# EAGLE board Module-WiFi-M0-v0.4-Board 2 (EAGLE 7.5.0)
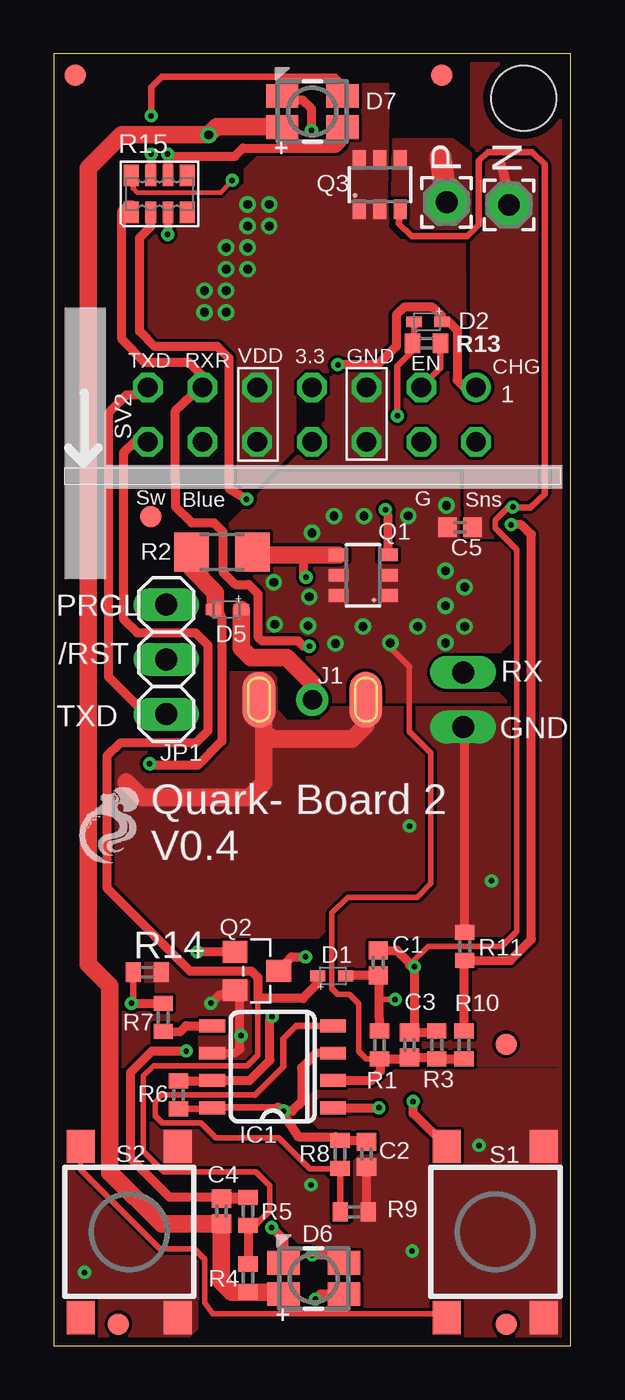
[diagram p0: board, top side]
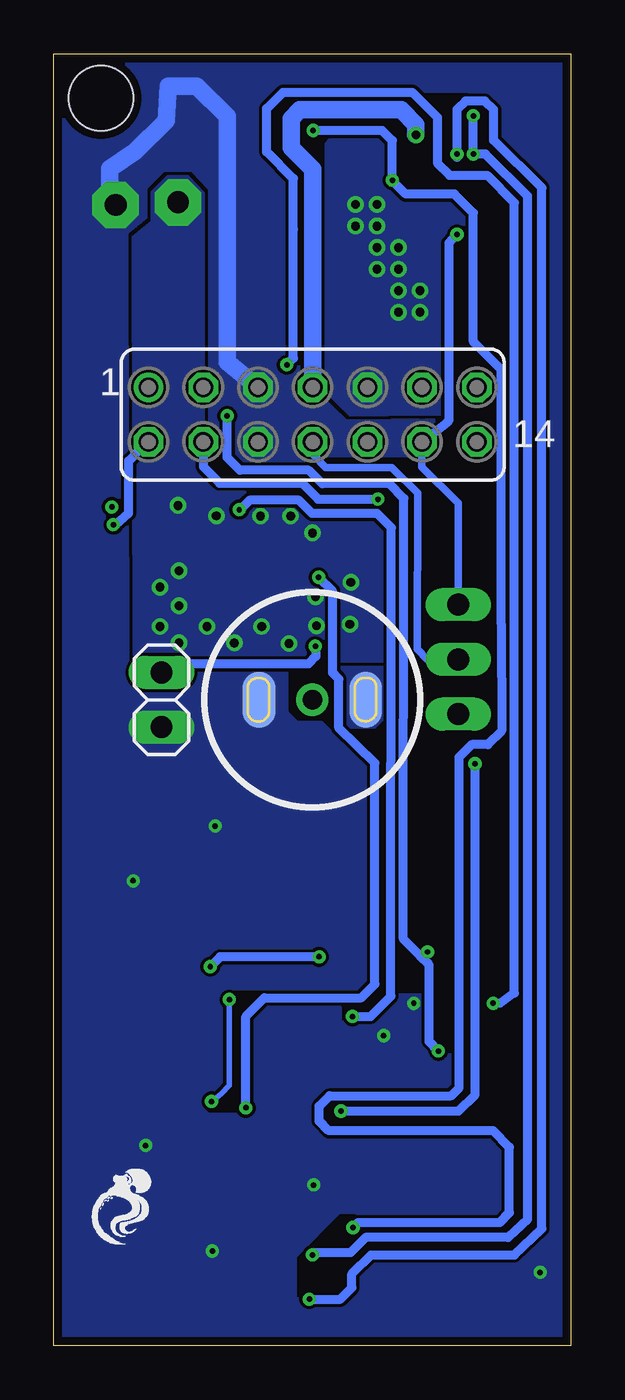
[diagram p1: board, bottom side, seen from below]

Size 24 x 60 mm. Coordinates in mm from the lower left corner, seen from the top.
Outline: 0,60 0,0 24,0 24,60 0,60
Copper layers (1*16): Top 0.0356mm / dielectric 1.5011mm / Bottom 0.0356mm
Design rules "oshpark-2layer-via-buried": minimum track width 6mil, minimum drill 10mil, track to track 6mil, track to pad 6mil, pad to pad 6mil, via to via 6mil, smd to smd 6mil, copper to edge 15mil, drill to drill 6mil, minimum pad ring 7mil, minimum via ring 7mil, stop-mask expansion 2.5mil, vias tented up to drill 16mil, thermal gap 10mil
Holes 3 mm at 21.81,57.94
tRestrict: 51 lines
bRestrict: area 7,16.4 to 8.1,16.6; 20 lines

## Footprints (pad centres in the part's own frame; a part is rotated, then mirrored left to right if it is on the bottom)
0402-CAP = smd 0.85 x 0.9: 1 -0.58,0; 2 0.58,0
SOD523 = smd 0.7 x 0.5: A 0.7,0; C -0.6,0
LED_RGB_DIFFUSE = smd 1.1 x 1.5: 1-RD -0.725,-1.4; 2-GR -0.725,1.4; 3-BL 0.725,1.4; 4-CA 0.725,-1.4
SOIC-8-TIGHT = smd 0.6 x 1.2: 1 -1.905,-2.8; 2 -0.635,-2.8; 3 0.635,-2.8; 4 1.905,-2.8; 5 1.905,2.8; 6 0.635,2.8; 7 -0.635,2.8; 8 -1.905,2.8
CONN-MAG = smd 1.5 x 2.6 bottom: GND@1 -2.475,0; GND@4 2.475,0 | smd 1.5 x 2.6: GND@2 2.475,0; GND@3 -2.475,0 | drill 0.9 pad 1.5: POS 0,0
1X03 = drill 1.016 long: 1 -2.54,0; 2 0,0; 3 2.54,0
2,15/1,0 = drill 1.016 pad 2.159 octagon: 1 0,0
SOT23-6 = smd 0.6 x 0.9: 1 -0.95,-1.15; 2 0,-1.15; 3 0.95,-1.15; 4 0.95,1.15; 5 0,1.15; 6 -0.95,1.15
SOT-23 = smd 1.016 x 1.143: 1 -0.889,-1.016; 2 0.889,-1.016; 3 0,1.016
R0402 = smd 0.7 x 0.9: 1 -0.65,0; 2 0.65,0
R1206 = smd 1.6 x 1.803: 1 -1.422,0; 2 1.422,0
RA1206-8 = smd 0.7 x 1: 1 -1.3,-0.85; 4 1.3,-0.85; 5 1.3,0.85; 8 -1.3,0.85 | smd 0.5 x 1: 2 -0.4,-0.85; 3 0.4,-0.85; 6 0.4,0.85; 7 -0.4,0.85
1X02 = drill 1.016 long: 1 -1.27,0; 2 1.27,0
TACTILE_SWITCH_TALL = smd 1.55 x 1.3: A1 -3.975,-2.25; A2 3.975,-2.25; B1 -3.975,2.25; B2 3.975,2.25
FE07-2 = drill 0.914: 1 -7.62,1.27 | drill 0.914 octagon: 2 -7.62,-1.27; 3 -5.08,1.27; 4 -5.08,-1.27; 5 -2.54,1.27; 6 -2.54,-1.27; 7 0,1.27; 8 0,-1.27; 9 2.54,1.27; 10 2.54,-1.27; 11 5.08,1.27; 12 5.08,-1.27; 13 7.62,1.27; 14 7.62,-1.27
FIDUCIAL = smd 1 x 1: P$1 0,0

## Placement (x,y rotation side)
C1  0.1uF  [0402-CAP]  15.06,17.78 90 top
C2  0.1uF  [0402-CAP]  14.51,8.89 270 top
C3  0.1uF  [0402-CAP]  16.51,13.97 90 top
C4  0.1uF  [0402-CAP]  7.78,6.25 90 top
C5  0.1uF  [0402-CAP]  18.85,38.01 0 top
D1  PMEG3005EB  [SOD523]  12.95,17.17 180 top
D2  PMEG3005EB  [SOD523]  17.32,47.55 0 top
D5  PMEG3005EB  [SOD523]  8.01,34.19 0 top
D6  [LED_RGB_DIFFUSE]  12.06,3.12 270 top
D7  [LED_RGB_DIFFUSE]  12,57.32 270 top
IC1  BQ2057WSNTR  [SOIC-8-TIGHT]  10.16,12.95 90 top
J1  CONN-CIR_MAG  [CONN-MAG]  12,30 0 bottom
JP1  [1X03]  5.22,31.87 270 top
N  WIREPAD2,15/1,0  [2,15/1,0]  21.13,52.98 270 top
P  WIREPAD2,15/1,0  [2,15/1,0]  18.23,53.1 270 top
Q1  IRLTS2242-PMOS  [SOT23-6]  14.36,35.78 90 top
Q2  2N7002-NMOS  [SOT-23]  9.42,17.4 270 top
Q3  IRLTS2242-PMOS  [SOT23-6]  15.14,53.92 0 top
R1  30k  [R0402]  15.11,13.97 270 top
R2  0.62E, 0.5W  [R1206]  7.81,36.86 0 top
R3  300k  [R0402]  17.78,13.97 270 top
R4  300k  [R0402]  9.02,3.14 270 top
R5  300k  [R0402]  9.02,6.25 270 top
R6  3k  [R0402]  5.79,11.65 270 top
R7  3k  [R0402]  5.08,15.24 90 top
R8  3k  [R0402]  13.29,8.89 270 top
R9  3k  [R0402]  13.95,6.22 0 top
R10  30k  [R0402]  19.05,13.97 270 top
R11  3k  [R0402]  19.08,18.54 270 top
R13  3k  [R0402]  17.3,46.56 0 top
R14  1k  [R0402]  4.34,17.35 0 top
R15  75E  [RA1206-8]  4.9,53.49 0 top
RX  [1X02]  19,30 270 bottom
S1  On/Off Sw  [TACTILE_SWITCH_TALL]  20.5,5.28 90 top
S2  On/Off Sw  [TACTILE_SWITCH_TALL]  3.5,5.28 90 top
SV2  [FE07-2]  11.98,43.24 0 bottom
U$1  [OCTO_LOGO]  22.63,4.52 0 bottom
U$2  [OCTO_LOGO]  0.79,22.23 0 top
U$3  FIDUCIAL  [FIDUCIAL]  3,1 0 top
U$4  FIDUCIAL  [FIDUCIAL]  1,59 0 top
U$5  FIDUCIAL  [FIDUCIAL]  18,59 0 top
U$6  FIDUCIAL  [FIDUCIAL]  21,1 0 top
U$7  FIDUCIAL  [FIDUCIAL]  4.5,38.5 0 top
U$8  FIDUCIAL  [FIDUCIAL]  21,14 0 top

## Library data of the parts
C1-C5 = 1_ZeroUI; PROD_ID: CAP-12416
D1 D2 D5 = diode
D6 D7 = 1_ZeroUI; VARIANT: ASMB-MTB1-0A3A2-Diffuse
IC1 = 1_ZeroUI; DATASHEETURL: http://www.ti.com/lit/ds/symlink/bq2057c.pdf
J1 Q1 Q3 U$1-U$8 = 1_ZeroUI
JP1 RX = pinhead
N P = wirepad
Q2 = 1_ZeroUI; MPN: 2N7002,215
R1-R11 R13 R14 = rcl
R15 = Seeed-OPL-Resistor
S1 S2 = 1_ZeroUI; PROD_ID: SWCH-11966
SV2 = con-lsta; OC_FARNELL: unknown; OC_NEWARK: unknown

## Nets
3.3V: C4.1 D6.4-CA D7.4-CA R4.2 SV2.7
12V: C2.1 D5.C IC1.3 IC1.8 R2.1 R6.2 R8.1
/RST: JP1.2 SV2.8
CHG_ON: D2.A R7.2 R14.1 SV2.1
GND: C2.2 C5.2 IC1.6 J1.GND@1 J1.GND@2 J1.GND@3 J1.GND@4 N.1 Q2.2 R9.2 R11.1 R14.2 RX.2 S1.A1 S1.A2 S2.A1 S2.A2 SV2.5 SV2.6
LED-G: R15.2 SV2.4
N$1: D6.1-RD D7.1-RD R15.8
N$2: D6.2-GR D7.2-GR R15.7
N$3: D6.3-BL D7.3-BL R15.6
N$4: C1.1 D1.C R1.1 S1.B1 S1.B2 S2.B1 S2.B2
N$5: C1.2 C3.2 Q2.3 Q3.3 R3.1
N$6: IC1.5 R7.1
N$7: D5.A J1.POS
N$8: R13.2 SV2.3
N$10: IC1.1 Q1.4 R2.2
N$13: IC1.7 Q1.3 R6.1
PROGL/LED-B: JP1.1 R15.3 SV2.12
PWR_EN: C4.2 D2.C Q2.1 R5.1 R13.1
RXD/LED-R: R15.1 RX.1 SV2.11
SW_INT: D1.A R4.1 R5.2 SV2.14
TS1: IC1.4 R8.2 R9.1
TXD: JP1.3 SV2.13
V_BATT: C3.1 C5.1 IC1.2 P.1 Q1.1 Q1.2 Q1.5 Q1.6 Q3.4 R1.2 R3.2 R10.2
VBATT_SENSE: R10.1 R11.2 SV2.2
VDD: Q3.1 Q3.2 Q3.5 Q3.6 SV2.9 SV2.10

## Tracks (layer width: path | path; a pad name or v marks a point on that pad's centre or on a via)
3.3V  (via drill 0.41)
  Top 0.813: 7.16,56.24 3.15,56.24 1.6,54.69 1.6,17.7 2.6,16.7 2.6,8.04 2.67,7.98 5.01,5.67 C4.1 7.78,2.96 8.25,2.49 R4.2 10.46,2.49 D6.4-CA | v7.19,56.24 7.16,56.24 | 7.16,56.24 7.55,56.62 10.53,56.62 D7.4-CA
  Bottom 0.813: SV2.7 11.99,45.33 11.99,54.63 12.98,55.64 12.98,56.99 12.58,57.4 7.88,57.4 7.19,56.71 v7.19,56.24
12V  (via drill 0.25)
  Top 0.305: 10.41,11.07 7.34,11.08 IC1.8 | R6.2 7.29,11.01
  Top 0.406: IC1.3 12.19,13.59 11.51,12.91 11.51,11.33 11.07,10.9 11,10.9 v10.67,10.89 10.67,10.73 10.76,10.6 | 10.41,11.07 10.59,10.9 10.7,10.9 10.7,10.7 10.76,10.6 | 10.76,10.6 11.34,9.7 13.08,9.7 R8.1 14.44,9.54 C2.1 | 7.5,34.19 D5.C 7.64,34.19 7.8,33.81 7.8,28.08 6.67,26.95 4.39,26.95 v4.45,27.03 | 6.4,36.65 R2.1 | 7.29,11.01 IC1.8
  Top 0.813: 7.5,34.19 7.5,34.98 6.4,36.09 6.43,36.62 6.4,36.65
  Bottom 0.406: v10.67,10.89 5.21,10.89 4.45,11.66 v4.45,27.03
/RST
  Bottom 0.305: SV2.8
  Bottom 0.356: JP1.2 6.65,31.88 7.14,32.36 7.11,39.59 8.31,40.79 11.38,40.79 11.96,41.38 SV2.8
CHG_ON  (via drill 0.25)
  Top 0.305: R14.1 3.69,15.99 v3.61,15.9
  Top 0.406: v3.61,15.9 3.85,15.89 R7.2 | SV2.1 19.05,44.51 18.72,44.85 18.72,47.16 18.35,47.54 D2.A 18,47.85 17.59,48.23 16.26,48.23 15.9,47.88 15.9,46.42 15.05,45.56 v13.18,45.56
  Bottom 0.406: v3.61,15.9 3.28,15.9 2.62,16.38 2.62,53.08 3.89,54.36 5.62,54.36 6.2,54.93 6.2,57.05 7.37,58.22 13.36,58.22 14.12,57.45 14.12,55.45 12.88,54.2 12.88,51.84 12.88,45.86 v13.18,45.56
GND  (via drill 0.25)
  Top 0.406: R9.2 14.55,6.12 14.55,6.1 14.5,6.22 C2.2 14.64,8.18 | IC1.6 8.39,13.59 8.64,13.78 8.64,16.05 Q2.2 7.7,16.28 7.42,16 v7.29,15.9 | R11.1 19.08,28.65 RX.2 | 9.75,29.77 J1.GND@4 | 21.23,53.24 20.78,54.84 N.1
  Top 0.813: 3.35,26.19 4.09,25.45 9.07,25.45 9.75,26.14 9.75,28.55 | 9.75,29.77 9.75,28.55 | 9.75,28.55 10.13,28.17 13.84,28.17 14.48,28.8 J1.GND@3
  Bottom 0.406: 14.53,44.25 SV2.5
  Bottom 0.813: SV2.5 15.95,45.69 15.95,57.09 17.35,58.5 18.68,58.5 18.77,56.89 20.24,55.45 21.41,54.66 21.41,53.65
  other vias: 19.74,9.3 16.51,24.13 16.64,4.39 11.94,7.47 8.69,14.4 1.42,3.4 20.32,21.59
  pour Bottom (rank 6, no thermals): -35.56,68.58 73.66,68.58 73.66,-15.24 -35.56,-15.24
  pour Top (rank 6, no thermals): -19.05,39.95 9.7,39.95 12.7,42.95 12.7,45.21 19.37,45.21 19.43,47.78 19.43,66.04 34.29,66.04 34.29,-7.62 -19.05,-7.62
LED-G  (via drill 0.25)
  Top 0.254: R15.2 4.5,52.28 4.5,51.97
  Top 0.406: v8.95,39.32 8.13,39.82 8.13,45.88 7.59,46.41 4.69,46.41 3.98,47.11 3.98,51.46 4.5,51.97 4.5,52.92
  Bottom 0.406: SV2.4 17.06,40.82 16.3,40.06 12.47,40.06 11.73,39.32 v8.95,39.32
N$1  (via drill 0.25)
  Top 0.203: 3.69,53.76 3.86,53.54 7.75,53.54 v8.28,54.13
  Top 0.254: 3.69,53.76 3.69,54.25 R15.8
  Top 0.406: v10.11,5.49 10.66,4.93 D6.1-RD | 10.51,57.93 D7.1-RD 10.71,57.86 11.55,57.86 11.96,57.45 v11.96,56.44
  Bottom 0.406: v10.11,5.49 9.88,5.71 3.3,5.71 2.85,6.17 2.85,9.22 3.61,9.98 11.23,9.98 11.68,10.44 11.68,11.12 11.2,11.61 5.55,11.61 5.18,11.97 5.18,27.34 4.61,27.91 3.85,27.91 3.21,28.55 3.23,33.48 3.23,45.33 4.52,46.63 4.52,52.61 5.4,53.49 7.66,53.49 8.28,54.11 v8.28,54.13 8.29,55.97 8.75,56.44 11.79,56.44 v11.96,56.44
N$2  (via drill 0.25)
  Top 0.305: v4.52,57.12 4.52,58.44 5.02,58.93 13.06,58.93 13.41,58.58 13.44,57.94 D7.2-GR | 4.52,54.2 4.52,54.32 R15.7
  Top 0.406: v11.99,4.22 13.1,4.22 D6.2-GR | 4.52,54.2 v4.52,55.35
  Bottom 0.406: v11.99,4.22 11.89,4.32 10.24,4.32 9.53,5.03 2.9,5.03 2.01,5.88 2.01,53.39 3.96,55.35 v4.52,55.35 v4.52,57.12
N$3  (via drill 0.25)
  Top 0.305: 5.31,54.19 R15.6 5.29,54.35 5.27,55.24
  Top 0.406: v12.14,2.16 12.38,2.4 D6.3-BL | 5.27,55.24 8.4,55.24 8.78,55.63 13.13,55.63 13.39,55.88 13.39,56.08 D7.3-BL | v5.28,55.35 5.31,54.19
  Bottom 0.406: v12.14,2.16 10.7,2.16 10.16,2.7 10.16,3.33 9.27,4.22 2.62,4.22 1.35,5.44 1.35,53.77 3.58,55.98 3.58,57.41 3.98,57.81 4.89,57.81 5.28,57.41 v5.28,55.35 5.28,55.19
N$4  (via drill 0.25)
  Top 0.254: v15.85,16.08 15.12,16.08 15.12,16.13 | S2.B2 1.25,8.18 4.92,4.5 6.51,4.5 7,4.01 7,2 7.38,1.47 17.68,1.47 17.8,1.7 17.82,1 S1.B1
  Top 0.406: R1.1 15.12,15.2 15.12,16.13 15.12,16.82 C1.1 13.88,17.2 D1.C 13.56,17.18 | S1.B2 16.68,10.79 v16.68,11.34
  Bottom 0.254: v16.68,11.34 16.24,11.7 15.85,12.09 v15.85,16.08
N$5  (via drill 0.25)
  Top 0.254: 16.51,17.68 17.37,18.54 20.79,18.54 21.49,19.25 21.49,36.98 20.5,37.97 20.5,38.34 21.11,38.95 v21.31,38.95
  Top 0.305: Q3.3 16.02,52.11 16.61,51.53 19.19,51.53 19.74,52.07 19.74,55.03 20.14,55.44 22.22,55.43 22.78,54.87 22.78,39.56 22.12,38.93 21.31,38.93 v21.31,38.95
  Top 0.406: 17.71,14.55 C3.2 16.74,14.78 v16.74,17.6 16.51,17.68 16.51,17.78 15.93,18.36 C1.2 | Q2.3 11.02,18.06 v11.68,18.06
  Top 0.61: 17.71,14.55 R3.1
  Bottom 0.406: v11.68,18.06 16.28,18.06 v16.74,17.6
N$6
  Top 0.406: R7.1 5.87,14.58 6.14,14.86 IC1.5
N$7
  Top 0.406: 12.01,30.01 J1.POS
  Top 0.813: D5.A 8.71,32.41 9.15,31.96 10.81,31.96 12.01,30.75 12.01,30.01
N$8
  Top 0.305: R13.2 17.95,45.4 SV2.3
N$10  (via drill 0.25)
  Top 0.406: IC1.1 v15.09,11.05 | v11.71,35.69 11.61,35.79 11.61,36.73
  Top 0.61: 9.54,36.73 R2.2
  Top 0.813: Q1.4 11.61,36.73 9.54,36.73
  Bottom 0.406: v15.09,11.05 15.09,15.29 14.22,16.15 9.73,16.15 9.1,16.78 9.1,27.05 10.77,28.68 10.77,30.96 10.98,31.17 11.06,31.25 11.06,35.04 v11.71,35.69
N$13  (via drill 0.25)
  Top 0.406: R6.1 7.19,12.3 7.29,12.34 IC1.7 9.09,12.32 10.03,13.26 10.03,15.16 10.13,15.27 v10.13,15.29 | Q1.3 15.51,38.55 v15.39,38.83
  Bottom 0.406: v10.13,15.29 9.3,15.29 8.36,16.23 8.33,37.99 8.99,38.65 12.01,38.65 12.62,39.27 14.91,39.27 15.35,38.83 v15.39,38.83
PROGL/LED-B  (via drill 0.25)
  Top 0.254: 5.28,52.4 5.28,52.62 R15.3
  Top 0.406: v5.28,51.61 5.28,52.4 5.29,52.41
  Bottom 0.356: JP1.1 5.22,39.13 6.91,40.82 SV2.12
  Bottom 0.406: v5.28,51.61 5.66,51.21 5.66,43 5.74,42.88 SV2.12 6.86,41.68
PWR_EN  (via drill 0.25)
  Top 0.305: D2.C 16.71,46.57 16.58,46.44 R13.1 16.64,46.47 16.64,46.2 15.95,45.49 v15.95,43.18
  Top 0.406: C4.2 8.95,6.83 R5.1 5.37,6.9 3.56,8.71 3.56,12.69 4.57,13.69 v6.15,13.69 | Q2.1 v6.66,18.29
  Bottom 0.406: v6.15,13.69 6.58,14.12 6.58,17.68 7.01,18.11 6.78,18.14 v6.66,18.29 7,18.11 7.77,18.88 7.75,39.35 8.43,40.03 11.53,40.03 12.17,40.66 15.37,40.66 15.95,41.25 v15.95,43.18
RXD/LED-R  (via drill 0.25)
  Top 0.254: R15.1 3.35,52.89
  Top 0.406: v11.86,32.49 11.58,32.49 11.33,32.74 9.65,32.74 9.47,32.92 9.47,34.65 9.47,34.92 9.04,35.36 8.43,35.36 7.85,35.94 7.85,37.81 7.43,38.23 6.39,38.23 5.64,38.98 5.64,40.05 5.64,40.1 5.64,43.43 6.38,44.12 6.86,44.12 SV2.11 6.88,44.18 6.88,45.08 6.28,45.67 4.23,45.67 3.16,46.74 3.16,52.7 3.35,52.89 3.44,52.98 3.63,52.98
  Bottom 0.406: v11.86,32.49 11.84,32.02 12.18,31.67 19,31.65 RX.1
SW_INT
  Top 0.254: R5.2 9.36,5.6 10.03,6.27 10.03,7.42 9.38,8.08 5.1,8.08 4.16,9.02 4.16,12.53 4.63,13.01 8.99,13.01 9.47,13.49 9.47,16.15
  Top 0.406: R5.2 R4.1 | SV2.14 3.75,41.98 3.23,41.46 3.23,33.76 3.86,33.12 6.57,33.12 7.15,32.54 7.15,28.56 6.58,27.99 3.07,27.99 2.46,27.38 2.46,21.25 6.32,17.4 9.17,17.4 9.47,17.09 9.47,16.15 9.47,16.13 11.56,16.13 12.25,16.83 D1.A
TS1
  Top 0.254: 9.34,11.66 6.5,11.66 6.38,11.65 5.02,11.65 4.7,11.33 4.7,10.68 5.04,10.34 6.81,10.34 7.51,9.65 10.44,9.65 10.7,9.4 11.88,8.21 13.19,8.21
  Top 0.305: IC1.4 11.25,14.86 10.64,14.25 10.64,12.96 9.34,11.66 | 13.19,8.21 R8.2 R9.1
TXD
  Top 0.406: SV2.13 4.36,44.17 3.38,44.17 2.54,43.33 2.54,31.06 4.29,29.31 5.12,29.31 JP1.3
V_BATT  (via drill 0.41)
  Top 0.254: 16.51,31.55 16.51,28.52 17.5,27.53 17.5,21.46 16.87,20.83 13.64,20.83 12.9,20.09 12.9,16.59 13.19,16.31 13.72,16.31 14.15,15.88 14.15,13.66 14.49,13.32 R1.2
  Top 0.305: 15.49,32.57 16.51,31.55
  Top 0.406: IC1.2 14.74,12.32 15.18,12.75 15.18,13.26 R1.2 16.44,13.32 | C3.1 17.71,13.39 | R3.2 R10.2
  Top 0.61: 16.44,13.32 C3.1 | 17.71,13.39 R3.2
  Top 1.016: 17.94,55.18 P.1
  other vias: 18.19,32.64 15.62,32.64 10.21,35.46 18.19,34.37 14.4,38.53 13.08,32.61 14.35,33.4 13,38.53 18.19,35.99 16.46,38.54 11.81,33.43 18.23,39.02 11.99,37.74 11.86,34.78 16.89,33.4 19.07,35.23 10.26,33.51 19.07,33.4
  pour Top (rank 5, no thermals): 12.79,29.91 8.11,34.55 8.09,38.04 10.52,40.49 18.77,40.49 18.8,37.23 21.41,37.23 21.41,29.95
  pour Bottom (no thermals): 8.4,39.7 16.12,39.77 17.07,40.73 17.07,53.54 17.78,54.29 18.71,54.29 19.43,53.57 19.43,52.2 20.32,51.49 20.27,31.8 8.38,31.8
  pour Top (no thermals): 18.62,51.44 16.4,51.44 15.75,52.08 15.8,55.98 18.53,55.98 19.76,55.05 19.76,52.09 19.03,51.42
VBATT_SENSE  (via drill 0.25)
  Top 0.406: R10.1 19.05,17.86 R11.2 21.19,17.89 22.17,18.87 22.17,37.68 21.7,38.13 v21.23,38.13
  Bottom 0.406: v21.23,38.13 21.13,38.13 20.52,38.66 20.52,41.09 19.91,41.7 19.62,41.7 SV2.2
VDD  (via drill 0.41)
  other vias: 8,49 9,52 7,49 10,52 9,50 8,48 7,48 10,53 9,53 8,51 8,50 9,51
  pour Top (rank 4, no thermals): -10.16,60.96 -10.16,39.95 9.42,39.95 11.15,41.68 11.15,44.61 11.82,45.27 19.08,45.13 19.02,51.28 16.09,51.28 15.47,51.91 15.47,52.4 15.44,52.43 15.49,60.81
  pour Bottom (no thermals): 8.51,43.28 10.19,43.25 11.86,44.85 11.99,54.58 12.67,56.13 8.56,56.13 8.56,54.2 7.67,53.31 5.36,53.31 4.72,52.68 4.72,44.09 5.54,43.28

## Text on the board
tPlace: PRGL | /RST | TXD | GND
tNames: VDD | 3.3 | GND | TXD | RXR | EN | CHG | 1 | Sw | Blue | G | Sns | Quark- Board 2 / V0.4
Reference: Battery / Terminal | To Drill Center | Top PCB / Mate | Rx | Tx | Module PCB- II / Bottom PCB | switch | switch | switch
tDocu: /RST